# EAGLE board CloudBoard (EAGLE 5.11)
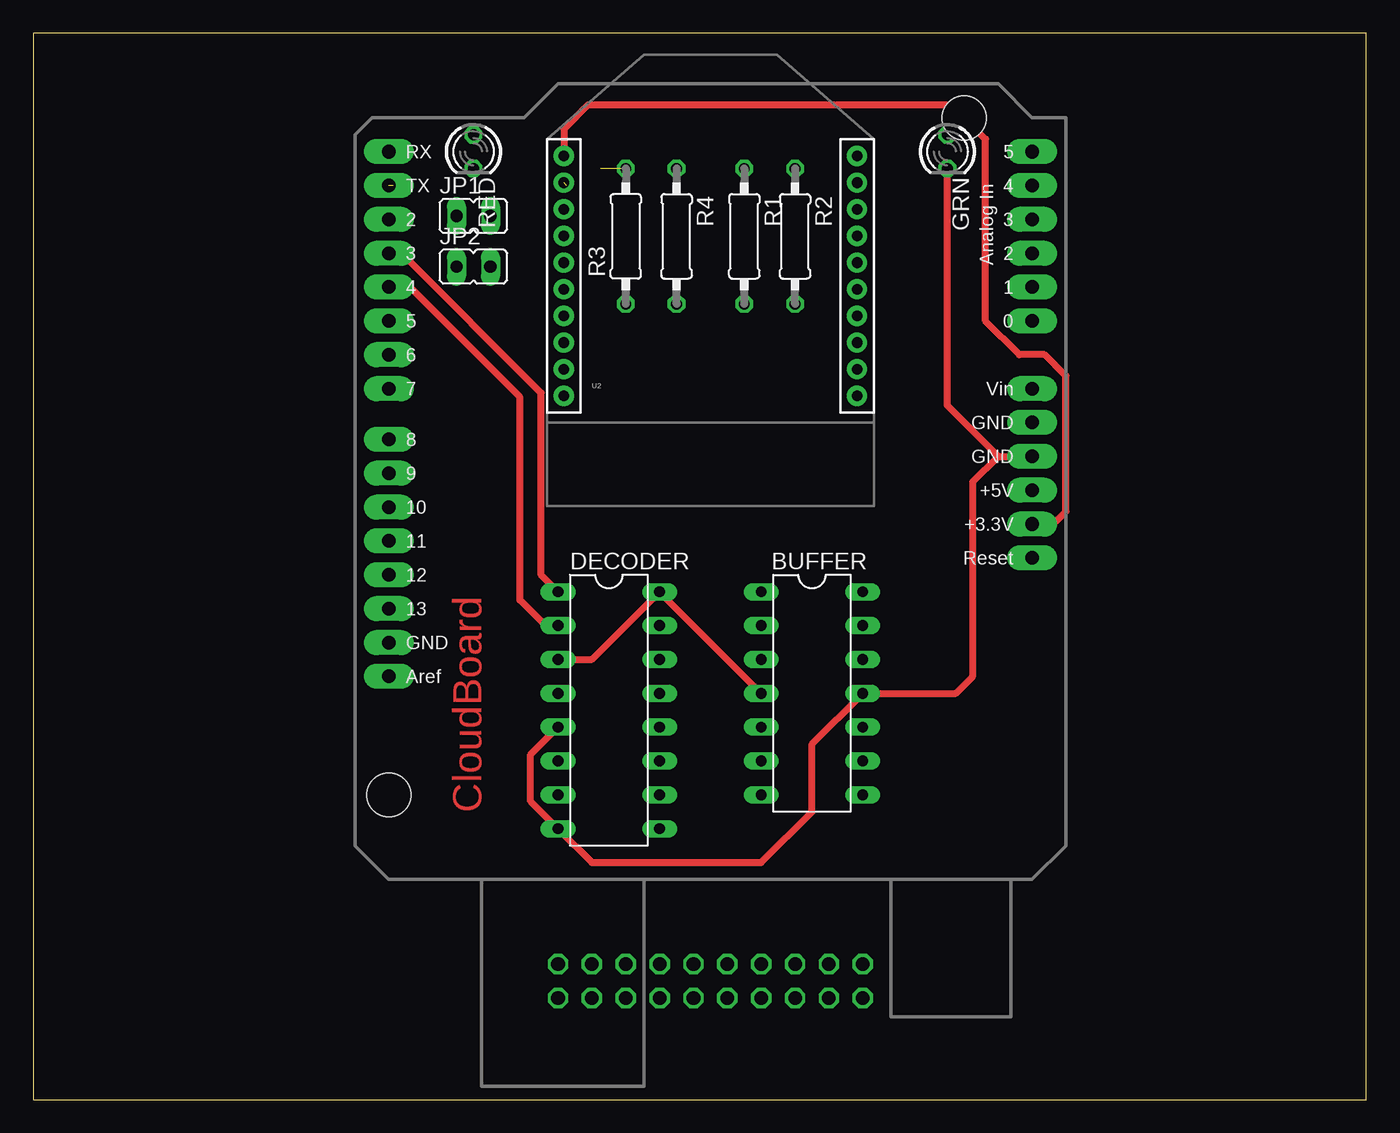
[diagram p0: board, top side]
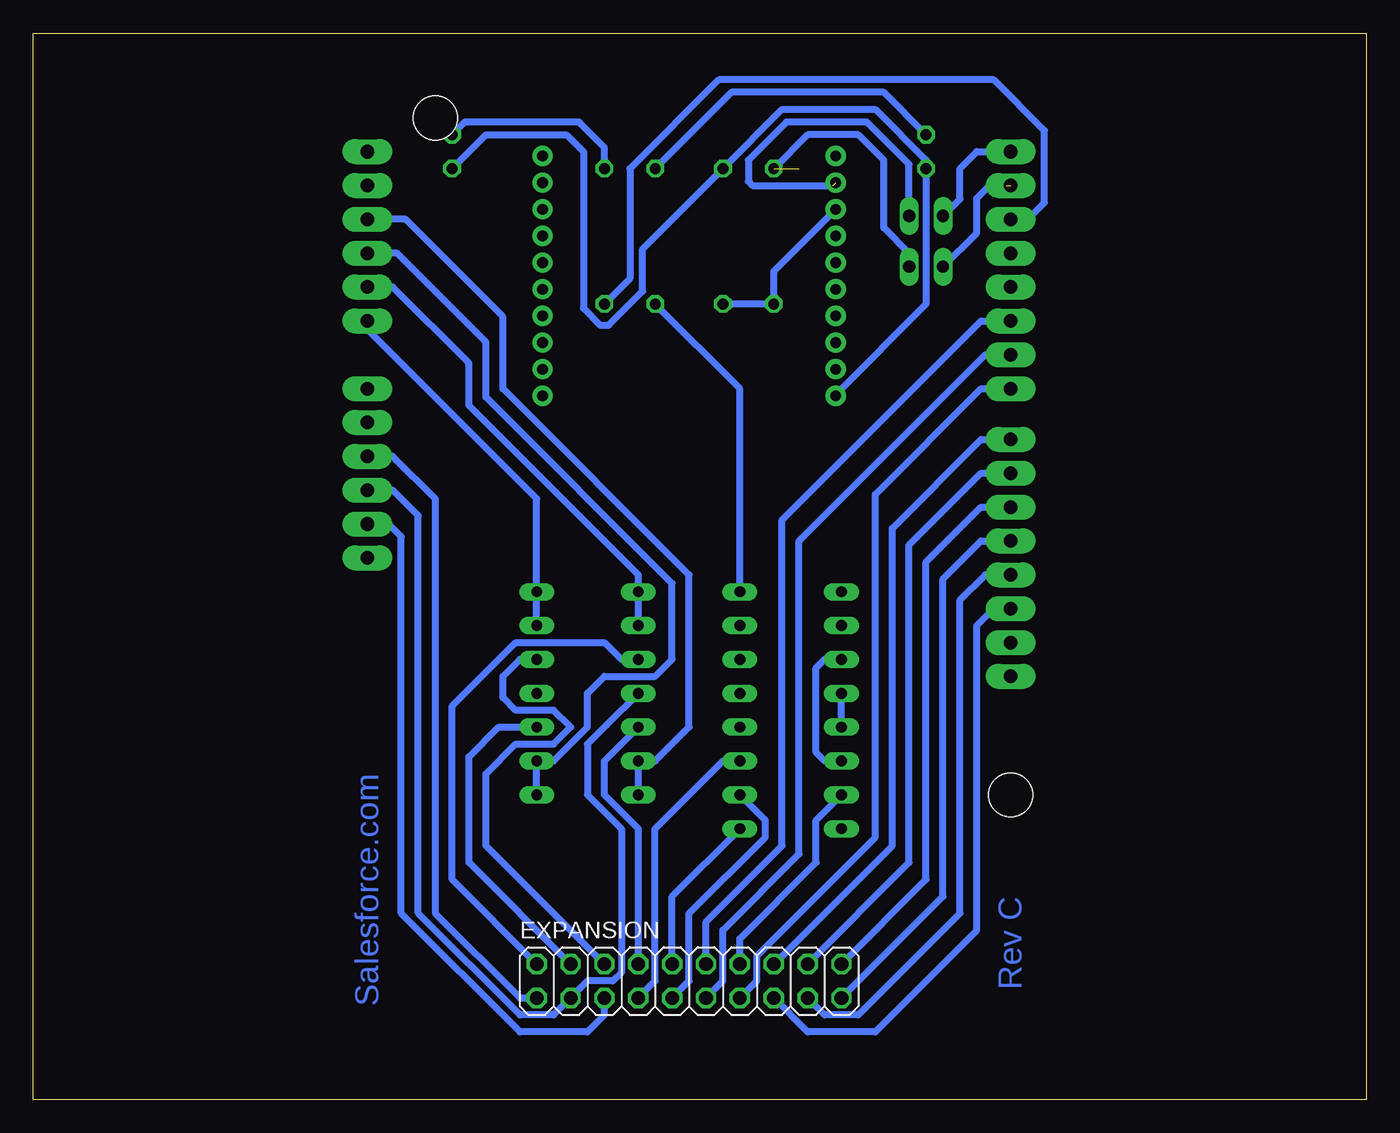
[diagram p1: board, bottom side, seen from below]

Size 100 x 80 mm. Coordinates in mm from the lower left corner, seen from the top.
Outline: 0,0 100,0 100,80 0,80 0,0
Copper layers (1*16): Top 0.035mm / dielectric 1.5mm / Bottom 0.035mm
Design rules "default": minimum track width 10mil, minimum drill 24mil, track to track 8mil, track to pad 8mil, pad to pad 8mil, via to via 8mil, smd to smd 8mil, copper to edge 40mil, drill to drill 8mil, minimum pad ring 10mil, minimum via ring 8mil, stop-mask expansion 4mil, vias tented up to drill 0mil, thermal gap 10mil

## Footprints (pad centres in the part's own frame; a part is rotated, then mirrored left to right if it is on the bottom)
DIL14 = drill 0.813 long: 1 -7.62,-3.81; 2 -5.08,-3.81; 3 -2.54,-3.81; 4 0,-3.81; 5 2.54,-3.81; 6 5.08,-3.81; 7 7.62,-3.81; 8 7.62,3.81; 9 5.08,3.81; 10 2.54,3.81; 11 0,3.81; 12 -2.54,3.81; 13 -5.08,3.81; 14 -7.62,3.81
DIL16 = drill 0.813 long: 1 -8.89,-3.81; 2 -6.35,-3.81; 3 -3.81,-3.81; 4 -1.27,-3.81; 5 1.27,-3.81; 6 3.81,-3.81; 7 6.35,-3.81; 8 8.89,-3.81; 9 8.89,3.81; 10 6.35,3.81; 11 3.81,3.81; 12 1.27,3.81; 13 -1.27,3.81; 14 -3.81,3.81; 15 -6.35,3.81; 16 -8.89,3.81
2X10 = drill 1.016 octagon: 1 -11.43,-1.27; 2 -11.43,1.27; 3 -8.89,-1.27; 4 -8.89,1.27; 5 -6.35,-1.27; 6 -6.35,1.27; 7 -3.81,-1.27; 8 -3.81,1.27; 9 -1.27,-1.27; 10 -1.27,1.27; 11 1.27,-1.27; 12 1.27,1.27; 13 3.81,-1.27; 14 3.81,1.27; 15 6.35,-1.27; 16 6.35,1.27; 17 8.89,-1.27; 18 8.89,1.27; 19 11.43,-1.27; 20 11.43,1.27
LED3MM = drill 0.813 octagon: A -1.27,0; K 1.27,0
JP1 = drill 0.914 long: 1 0,-1.27; 2 0,1.27
0207/10 = drill 0.813 octagon: 1 -5.08,0; 2 5.08,0
DUEMILANOVE_SHIELD_LONGPADS = drill 1.016 pad 1.88 long: 3.3V 50.8,26.67; 5V 50.8,29.21; A0 50.8,41.91; A1 50.8,44.45; A2 50.8,46.99; A3 50.8,49.53; A4 50.8,52.07; A5 50.8,54.61; AREF 2.54,15.24; D2 2.54,49.53; D3 2.54,46.99; D4 2.54,44.45; D5 2.54,41.91; D6 2.54,39.37; D7 2.54,36.83; D8 2.54,33.02; D9 2.54,30.48; D10 2.54,27.94; D11 2.54,25.4; D12 2.54,22.86; D13 2.54,20.32; GND@0 50.8,31.75; GND@1 50.8,34.29; GND@2 2.54,17.78; RES 50.8,24.13; RX 2.54,54.61; TX 2.54,52.07; VIN 50.8,36.83 | hole 3.302: 45.72,57.15; 2.54,6.35
XBEE-1 = drill 0.8 pad 1.524 round: 1 -11,20; 2 -11,18; 3 -11,16; 4 -11,14; 5 -11,12; 6 -11,10; 7 -11,8; 8 -11,6; 9 -11,4; 10 -11,2; 11 11,2; 12 11,4; 13 11,6; 14 11,8; 15 11,10; 16 11,12; 17 11,14; 18 11,16; 19 11,18; 20 11,20

## Placement (x,y rotation side)
BUFFER  TLV2374IN  [DIL14]  58.42,30.48 270 top
DECODER  74HC138N  [DIL16]  43.18,29.21 270 top
EXPANSION  [2X10]  50.8,8.89 0 bottom
GRN  [LED3MM]  68.58,71.12 270 top
JP1  [JP1]  33.02,66.29 270 top
JP2  [JP1]  33.02,62.48 270 top
R1  1K  [0207/10]  53.34,64.77 270 top
R2  1K  [0207/10]  57.15,64.77 270 top
R3  10K  [0207/10]  44.45,64.77 90 top
R4  20K  [0207/10]  48.26,64.77 270 top
RED  [LED3MM]  33.02,71.12 270 top
U1  ARDUINO_SHIELDLONGPADS  [DUEMILANOVE_SHIELD_LONGPADS]  24.13,16.51 0 top
U2  XBEE-1B1  [XBEE-1]  50.8,50.8 0 top

## Library data of the parts
BUFFER = mattlib
DECODER = 74xx-eu
EXPANSION = pinhead
GRN RED = led
JP1 JP2 = jumper
R1-R4 = rcl
U1 U2 = SparkFun

## Nets
B$2: BUFFER.8 BUFFER.9 U1.A2
N$1: BUFFER.1 BUFFER.2 U1.A1
N$2: EXPANSION.11 U1.D6
N$3: JP1.2 U2.2
N$4: BUFFER.6 BUFFER.7 U1.A3
N$5: BUFFER.13 BUFFER.14 U1.A0
N$6: BUFFER.4 DECODER.3 DECODER.6 DECODER.16 EXPANSION.3 R1.2 U1.5V
N$7: EXPANSION.5 U1.3.3V U2.1
N$8: JP1.1 U1.RX
N$9: BUFFER.3 EXPANSION.2
N$10: JP2.1 U1.TX
N$11: JP2.2 R3.2
N$12: R3.1 R4.2 U2.3
N$13: R1.1 RED.A
N$14: BUFFER.10 EXPANSION.4
N$15: BUFFER.12 EXPANSION.6
N$16: DECODER.11 EXPANSION.7
N$17: BUFFER.5 EXPANSION.8
N$18: DECODER.10 EXPANSION.9
N$19: DECODER.9 EXPANSION.10
N$20: DECODER.7 EXPANSION.14
N$21: EXPANSION.12 U1.D5
N$22: EXPANSION.13 U1.D7
N$24: EXPANSION.15 U1.D13
N$25: EXPANSION.16 U1.D8
N$26: EXPANSION.17 U1.D12
N$27: EXPANSION.18 U1.D9
N$28: EXPANSION.19 U1.D11
N$29: EXPANSION.20 U1.D10
N$30: GRN.A R2.1
N$31: R2.2 U1.D2
N$32: DECODER.1 U1.D3
N$33: DECODER.2 U1.D4
N$35: BUFFER.11 DECODER.4 DECODER.5 DECODER.8 EXPANSION.1 GRN.K R4.1 RED.K U1.GND@0 U2.10

## Tracks (layer width: path | path; a pad name or v marks a point on that pad's centre or on a via)
B$2
  Bottom 0.508: BUFFER.8 BUFFER.9 60.96,25.4 58.42,27.94 58.42,30.48 57.15,31.75 53.34,31.75 52.07,33.02 52.07,38.73 66.04,52.7 66.04,56.83 72.71,63.5 U1.A2
N$1
  Bottom 0.508: BUFFER.2 BUFFER.1 54.61,39.37 67.31,52.07 67.31,55.24 73.03,60.96 U1.A1
N$2
  Bottom 0.508: EXPANSION.11 48.26,8.89 48.26,12.7 42.55,18.41 42.55,41.91 28.57,55.88 U1.D6
N$3  (1 unrouted)
  Bottom 0.508: 40.02,68.58 46.04,68.58 46.35,68.9 46.35,70.48 43.5,73.34 37.47,73.34 34.29,70.17 JP1.2
N$4
  Bottom 0.508: BUFFER.7 BUFFER.6 53.34,25.4 50.8,27.94 50.8,39.37 64.77,53.34 64.77,58.74 72.07,66.04 U1.A3
N$5
  Bottom 0.508: BUFFER.13 BUFFER.14 62.23,45.09 74.93,57.78 U1.A0
N$6
  Top 0.508: BUFFER.4 DECODER.16 41.91,33.02 DECODER.3
  Bottom 0.508: DECODER.16 46.99,53.34 R1.2 | BUFFER.4 56.99,28.1 57.15,27.94 58.42,26.67 58.42,22.86 55.88,20.32 55.88,9.53 56.52,8.89 58.42,8.89 EXPANSION.3 60.96,6.35 63.5,6.35 71.12,13.97 71.12,43.81 73.03,45.72 U1.5V | DECODER.6 40.64,25.4 41.27,26.04 41.27,32.38 40.64,33.02 DECODER.3
N$7
  Top 0.508: U2.1 39.8,72.82 41.59,74.61 68.9,74.61 71.44,72.07 71.44,58.42 73.98,55.88 75.88,55.88 77.47,54.29 77.47,44.13 76.52,43.18 U1.3.3V
  Bottom 0.508: EXPANSION.5 57.15,6.35 58.42,5.08 63.5,5.08 72.39,13.97 72.39,42.23 73.34,43.18 U1.3.3V
N$8
  Bottom 0.508: U1.RX 29.21,71.12 30.48,69.85 30.48,67.56 JP1.1
N$9
  Bottom 0.508: BUFFER.3 55.88,33.02 57.15,34.29 63.82,34.29 68.58,29.53 68.58,16.51 EXPANSION.2
N$10  (1 unrouted)
  Bottom 0.508: 26.99,68.58 28.26,68.58 29.21,67.63 29.21,65.02 JP2.1
N$11  (1 unrouted)
  Bottom 0.508: JP2.2 34.29,63.5 36.2,65.41 36.2,70.48 38.1,72.39 41.91,72.39 R3.2
N$12
  Bottom 0.508: U2.3 44.45,62.15 R3.1 R4.2
N$13
  Bottom 0.508: R1.1 47.62,75.56 36.2,75.56 RED.A
N$14
  Bottom 0.508: EXPANSION.4 67.31,17.78 67.31,25.72 65.09,27.94 BUFFER.10
N$15
  Bottom 0.508: 62.55,33.02 BUFFER.12 63.5,33.02 64.77,31.75 64.77,30.16 63.82,29.21 60.96,29.21 59.69,27.94 60.96,26.67 63.82,26.67 66.04,24.45 66.04,19.05 EXPANSION.6
N$16
  Bottom 0.508: EXPANSION.7 53.34,8.89 53.34,20.32 48.26,25.4 DECODER.11
N$17
  Bottom 0.508: EXPANSION.8 54.61,20.32 57.15,22.86 57.15,25.4 BUFFER.5
N$18
  Bottom 0.508: EXPANSION.9 50.8,8.89 50.8,13.97 45.09,19.68 45.09,20.95 DECODER.10
N$19
  Bottom 0.508: DECODER.9 52.07,15.24 EXPANSION.10
N$20
  Bottom 0.508: DECODER.7 41.27,20.95 41.27,17.78 46.99,12.06 EXPANSION.14
N$21
  Bottom 0.508: EXPANSION.12 49.53,13.34 43.81,19.05 43.81,43.5 28.89,58.42 U1.D5
N$22
  Bottom 0.508: EXPANSION.13 45.72,8.89 45.72,10.79 36.83,19.68 36.83,45.4 28.89,53.34 U1.D7
N$24
  Bottom 0.508: U1.D13 27.94,36.83 29.21,35.56 29.21,12.7 36.83,5.08 41.91,5.08 EXPANSION.15
N$25
  Bottom 0.508: U1.D8 28.89,49.53 35.56,42.86 35.56,19.05 EXPANSION.16
N$26
  Bottom 0.508: EXPANSION.17 40.64,6.35 38.1,6.35 30.48,13.97 30.48,37.47 28.57,39.37 U1.D12
N$27
  Bottom 0.508: U1.D9 28.89,46.99 34.29,41.59 34.29,17.78 EXPANSION.18
N$28
  Bottom 0.508: U1.D11 28.89,41.91 31.75,39.05 31.75,15.24 EXPANSION.19
N$29
  Bottom 0.508: U1.D10 28.89,44.45 33.02,40.32 33.02,16.51 EXPANSION.20
N$30
  Bottom 0.508: GRN.A 67.63,73.34 59.05,73.34 57.15,71.44 R2.1
N$31
  Bottom 0.508: R2.2 55.24,61.59 55.24,69.85 48.58,76.52 27.94,76.52 24.13,72.71 24.13,67.31 25.4,66.04 U1.D2
N$32
  Top 0.508: U1.D3 27.62,63.5 38.1,53.02 38.1,39.37 DECODER.1
N$33
  Top 0.508: U1.D4 28.26,60.96 36.51,52.7 36.51,37.47 38.42,35.56 DECODER.2
N$35
  Top 0.508: 72.39,48.26 70.48,46.35 70.48,31.75 69.22,30.48 BUFFER.11 58.42,26.67 58.42,21.59 54.61,17.78 41.91,17.78 DECODER.8 | 72.39,48.26 U1.GND@0 | GRN.K 68.58,52.07 72.39,48.26 | DECODER.8 | DECODER.8 37.31,22.38 37.31,25.88 DECODER.5
  Bottom 0.508: EXPANSION.1 63.5,7.62 69.85,13.97 69.85,45.09 73.03,48.26 U1.GND@0 | DECODER.5 DECODER.4 | U2.10 39.8,52.91 33.02,59.69 RED.K 33.02,70.48 36.83,74.3 43.81,74.3 R4.1 54.29,63.82 54.29,60.64 56.83,58.1 57.47,58.1 58.74,59.37 58.74,71.12 60.01,72.39 66.04,72.39 GRN.K

## Text on the board
Top: CloudBoard
Bottom: Salesforce.com | Rev C